# Altium PCB E-21 Neopixel Blaster.PcbDoc
Units mil, origin at the board's own origin, x right, y up, seen from the top; angles counter-clockwise.
Board outline 1178 x 1493 mil, 2 copper layers (Top Layer, Bottom Layer); 17 components, 15 nets, 67 pads, 15 vias.
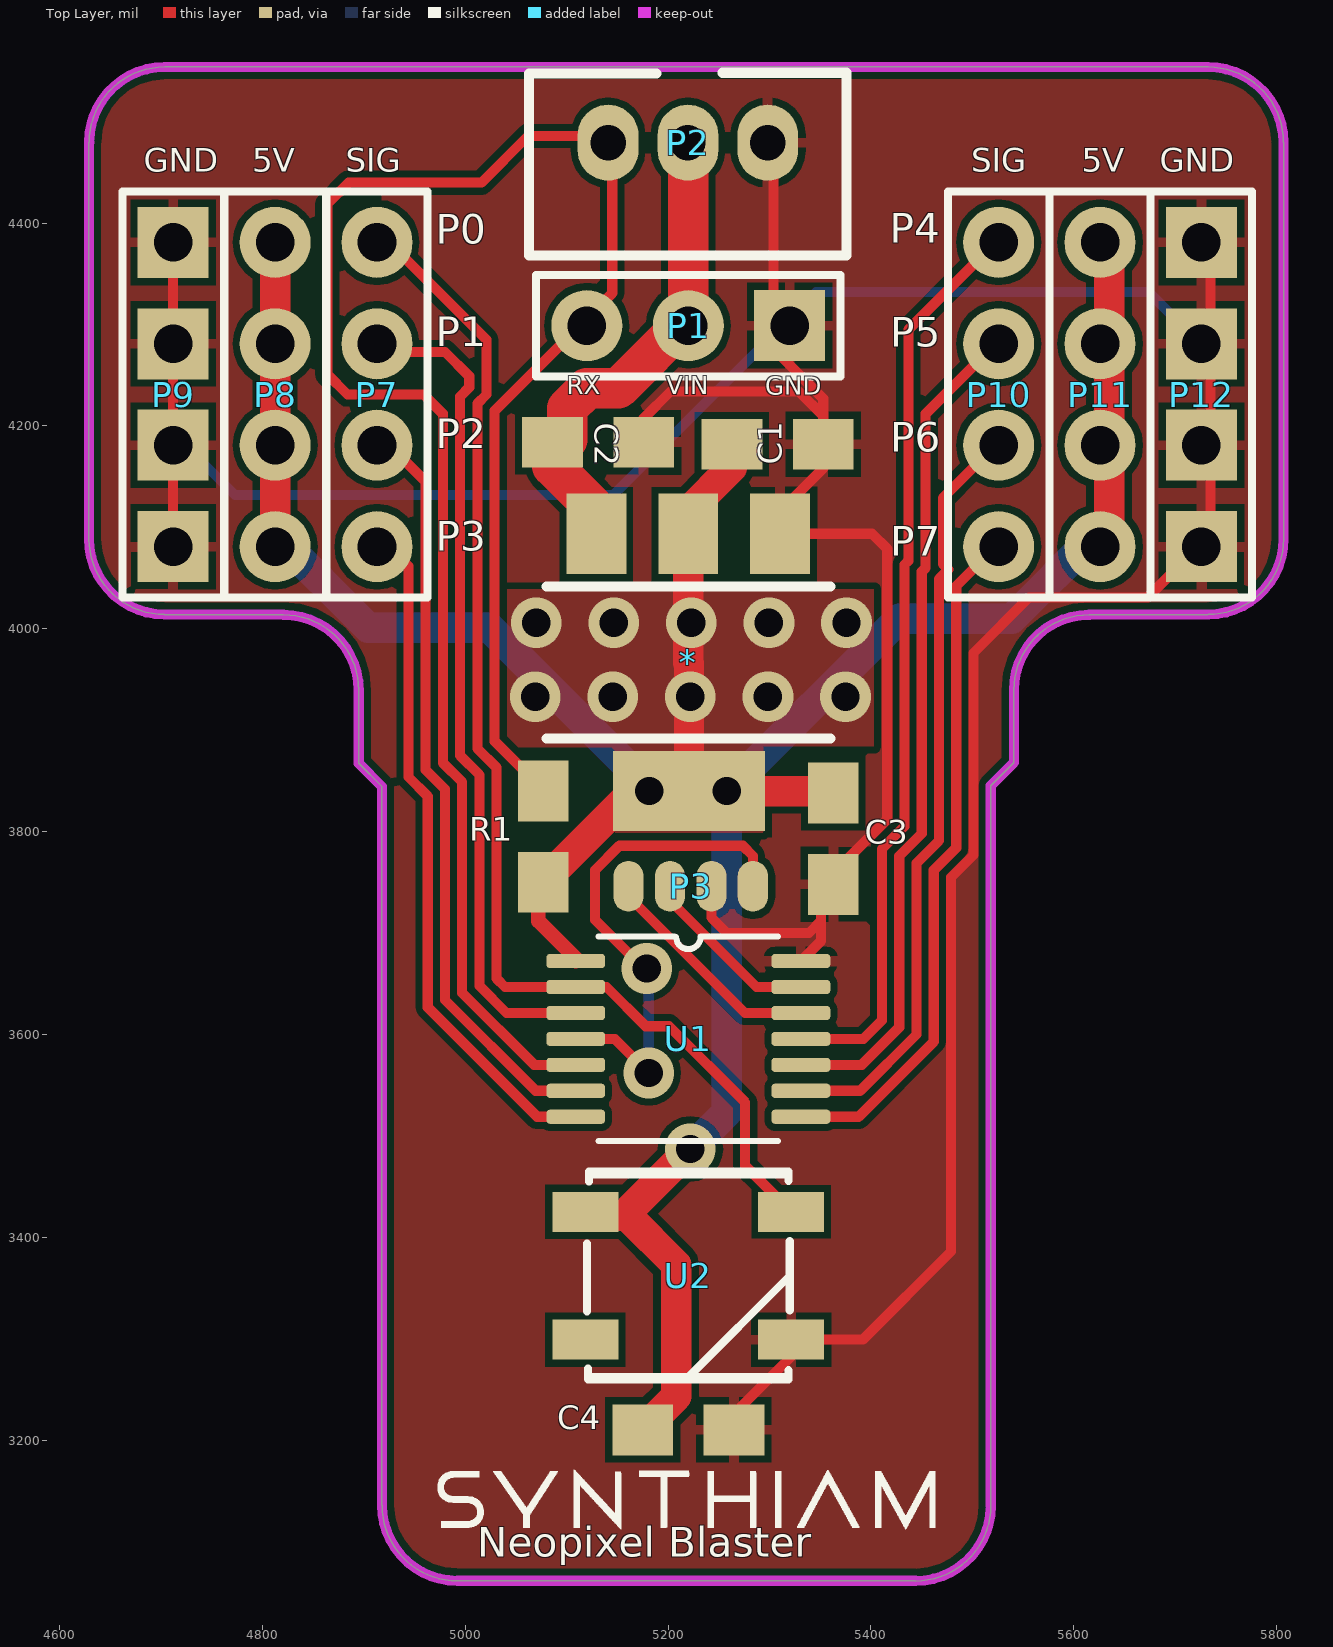
[diagram p0: Top Layer view]
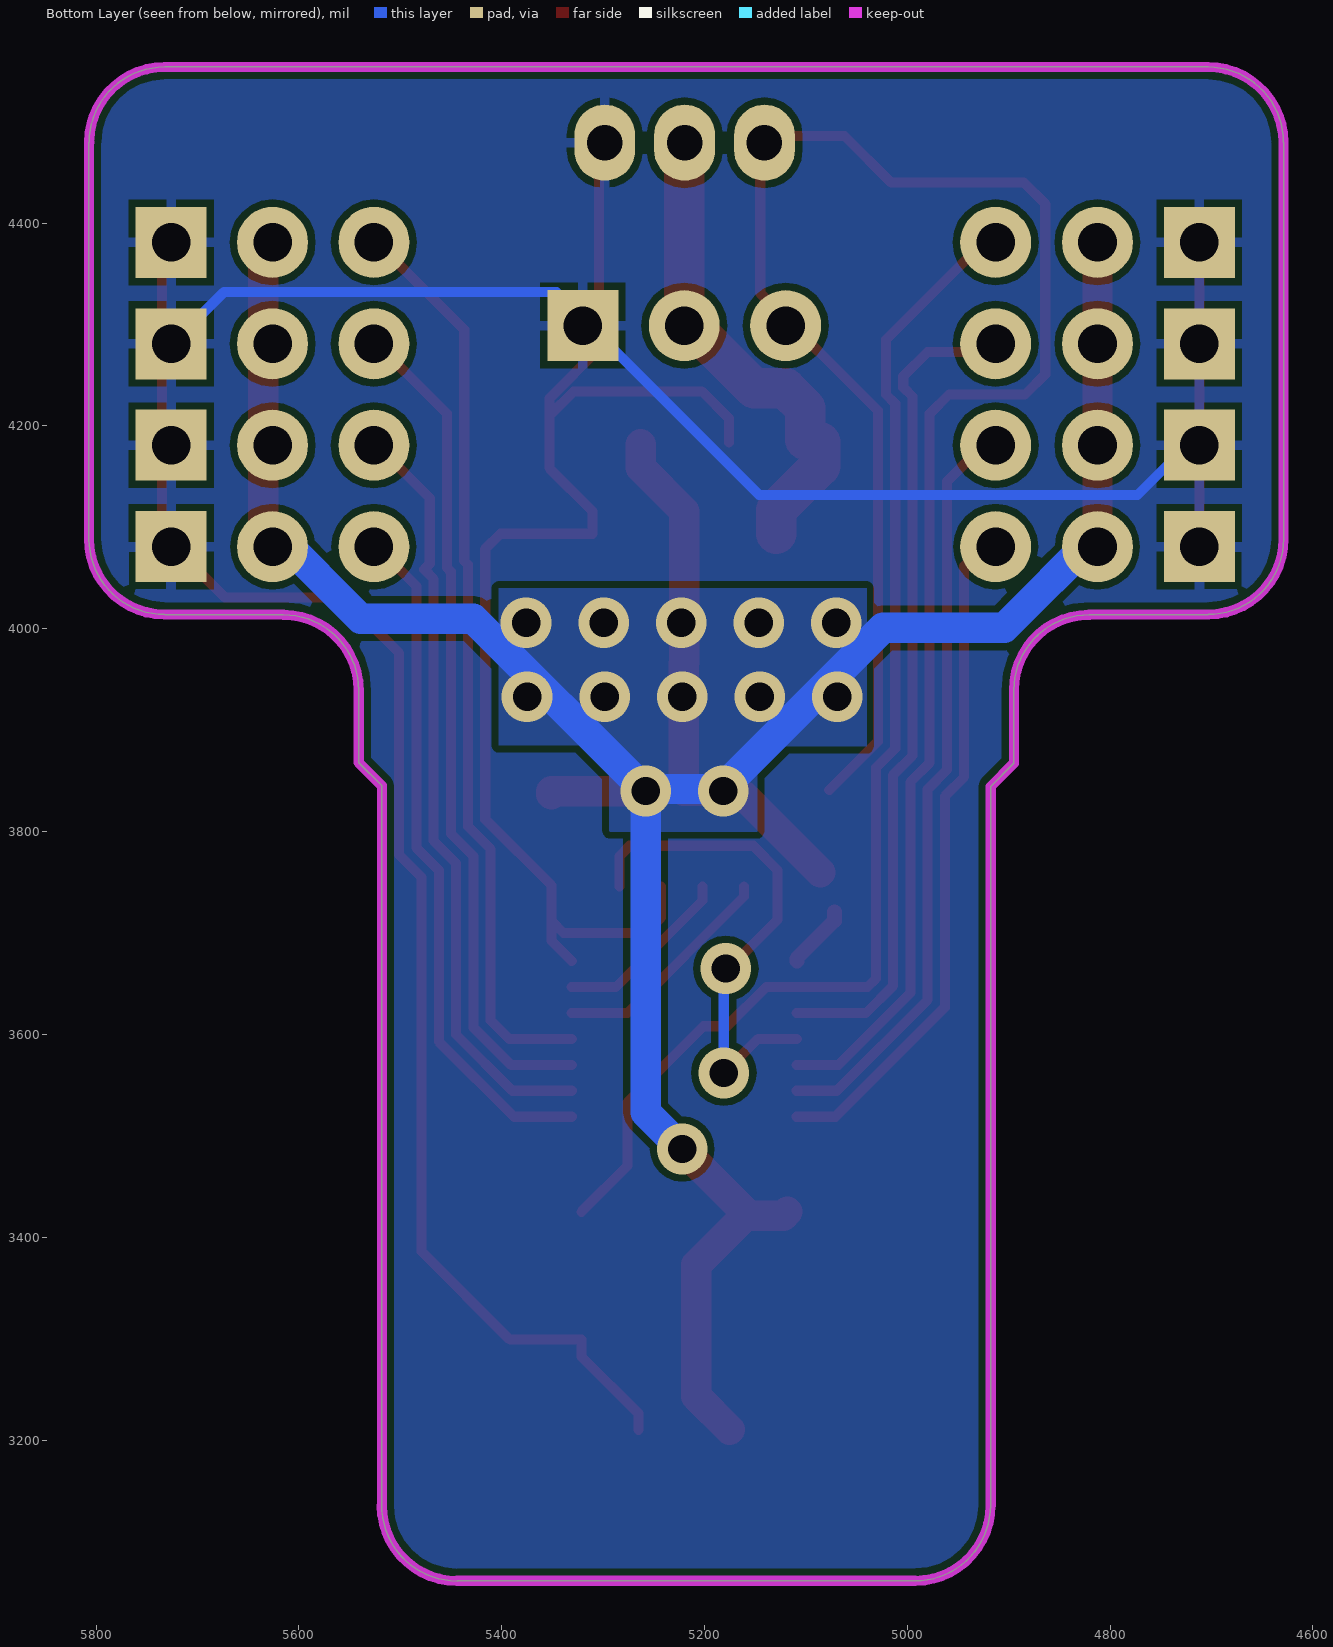
[diagram p1: Bottom Layer view, seen from below]

## Layer stack, top to bottom
Top Layer: signal copper 1.4
Dielectric: dielectric 12.6, FR-4, Dk 4.8
Bottom Layer: signal copper 1.4

## Board outline
4895,3867.31 4895,3939.5 ccw(c4820.69,3939.5) 4820.69,4013.81 4820.69,4014 4703.31,4014 4703.31,4014.19 cw(c4703.31,4088.5) 4629,4088.5 4629,4479.69 4629.19,4479.69 cw(c4703.5,4479.69) 4703.5,4554 5732.5,4554 cw(c5732.5,4479.69) 5806.81,4479.69 5807,4479.69 5807,4088.5 cw(c5732.69,4088.5) 5732.69,4014.19 5732,4014 5615.31,4014 5615.31,4013.81 ccw(c5615.31,3939.5) 5541,3939.5 5541,3868 5518.19,3845.19 5518.19,3135.31 5518.31,3135.31 cw(c5444,3135.31) 5444,3061 5444,3061.19 4992.31,3061.19 cw(c4992.31,3135.5) 4918,3135.5 4917.81,3135.5 4917.81,3844.5

## Design rules (kind name [scope] priority, off if disabled: settings)
Clearance [All] p1: gap=7
PolygonConnect PolygonConnect_7 [All vs IsNamedPolygon('Top Layer-VCC')] p1: connectstyle=Relief reliefconductorwidth=10 reliefentries=4 polygonreliefangle="90 Angle"
PolygonConnect PolygonConnect_6 [All vs IsNamedPolygon('Btm Layer1-VCC')] p2: connectstyle=Direct reliefconductorwidth=10 reliefentries=4 polygonreliefangle="90 Angle"
PolygonConnect PolygonConnect_5 [All vs IsNamedPolygon('Top Layer 1-VCC')] p3: connectstyle=Direct reliefconductorwidth=10 reliefentries=4 polygonreliefangle="90 Angle"
PolygonConnect PolygonConnect_4 [All vs IsNamedPolygon('btmLayer-VCC')] p4: connectstyle=Relief reliefconductorwidth=10 reliefentries=4 polygonreliefangle="90 Angle"
PolygonConnect PolygonConnect_3 [All vs IsNamedPolygon('Top Layer-VCC')] p5: connectstyle=Relief reliefconductorwidth=10 reliefentries=4 polygonreliefangle="90 Angle"
PolygonConnect PolygonConnect_2 [All vs IsNamedPolygon('Btm Layer-VCC')] p6: connectstyle=Direct reliefconductorwidth=10 reliefentries=4 polygonreliefangle="90 Angle"
PolygonConnect PolygonConnect_1 [All vs IsNamedPolygon('Top Layer-VCC')] p7: connectstyle=Direct reliefconductorwidth=10 reliefentries=4 polygonreliefangle="90 Angle"
PolygonConnect [All] p8: connectstyle=Relief reliefconductorwidth=10 reliefentries=4 polygonreliefangle="90 Angle"
RoutingVias [All] p1: holewidth=28 width=50 viastyle="Through Hole" minholewidth=28 minwidth=50 maxholewidth=28 maxwidth=50
SMDNeckDown [All] p1: percent=105.000
SilkscreenOverComponentPads [All] p1: minsilkscreentomaskgap=10
SolderMaskExpansion [All] p1: expansion=4
Width Width_2 [InNet('VCC')] p1: maxlimit=40 minlimit=10 preferedwidth=30 minimp=50.000000 maximp=50.000000 favimp=50.000000
Width Width_1 [InNet('VIN')] p2: maxlimit=50 minlimit=10 preferedwidth=40 minimp=50.000000 maximp=50.000000 favimp=50.000000
Width [All] p3: maxlimit=10 minlimit=7 preferedwidth=10 minimp=50.000000 maximp=50.000000 favimp=50.000000
27 further rules are at their usual default settings.

## Components (designator, comment, footprint, x,y, rotation, side; value= is the part's Value field where it differs from the comment)
* "VREG1117" VREG1117 5220,3967 r180 top
C1 "Cap" "0805 Tight" 5131,4184 r0 top
C2 "Cap" "0805 Tight" 5308,4182 r0 top
C3 "18pF" "0805 TIGHT" 5363,3793 r90 top
C4 "18pF" "0805 TIGHT" 5220,3210 r180 top
P1 "Header 3" HDR1X3 5120,4299 r0 top
P2 "Header 3" "JST-PH 3-PIN" 5357,4537 r0 top
P3 "Header 4" "MINI PROG4" 5222,3746 r180 top
P7 "Header 4" HDR1X4#1 4913,4381 r270 top
P8 "Header 4" HDR1X4#1 4812.5,4381 r270 top
P9 "Header 4" HDR1X4#2 4712,4381 r270 top
P10 "Header 4" HDR1X4#1 5526,4381 r270 top
P11 "Header 4" HDR1X4#1 5626,4081 r90 top
P12 "Header 4" HDR1X4#2 5726,4081 r90 top
R1 "Res1" "0805 TIGHT" 5077,3795 r270 top
U1 "PIC16F1704-I/ST" TSSOP14 5220.87,3594 r0 top
U2 "WS2812B" ws2812b 5220,3362 r0 top

## Footprints (in the part's own frame and the unit in brackets; to place one, negate y for a bottom-side part, rotate by r counter-clockwise, add the part's x,y. Pads: shape width x height; smd on the part's side, far side on the other; paste and mask are expansions set on the pad)
"0805 Tight" [mil]
  rect 60x50 smd: 1(-45,0) 2(45,0)
"0805 TIGHT" [mil]
  rect 60x50 smd: 1(-45,0) 2(45,0)
HDR1X3 [mil] "Connector; Header; 3 Position"
  round 70 hole 38: 1(0,0) 2(100,0)
  rect 70x70 hole 38: 3(200,0)
  silkscreen extent -50,-50 250,50
HDR1X4#1 [mil] "Connector; Header; 4 Position"
  round 70 hole 38: 1(0,0) 2(100,0) 3(200,0) 4(300,0)
  silkscreen extent -50,-50 350,50
HDR1X4#2 [mil] "Connector; Header; 4 Position"
  rect 70x70 hole 38: 1(0,0) 2(100,0) 3(200,0) 4(300,0)
  silkscreen extent -50,-50 350,50
"JST-PH 3-PIN" [mil]
  oval 60x75 hole 35: 1(-216.11,-57.64) 2(-137.37,-57.64) 3(-58.63,-57.64)
  silkscreen extent -294,-169 19,11
"MINI PROG4" [mil]
  oval 30x50 smd: 1(-61.74,0) 2(-20.84,0) 3(20.05,0) 4(60.95,0)
TSSOP14 [mil] "PIC16F1503"
  rrect50% 58x14 smd mask+4: 1(-111.87,78.35) 2(-111.87,52.76) 3(-111.87,27.17) 4(-111.87,1.57) 5(-111.87,-24.02) 6(-111.87,-49.61) 7(-111.87,-75.2) 8(110.13,-75.2) 9(110.13,-49.61) 10(110.13,-24.02) 11(110.13,1.57) 12(110.13,27.17) 13(110.13,52.76) 14(110.13,78.35)
  silkscreen extent -89,-99 88,102
VREG1117 [mil]
  rect 59x79 smd: 1(-90.55,-126.77) 2(0,-126.77) 3(90.55,-126.77)
  rect 150x79 smd: 2(-0.67,126.77)
  silkscreen extent -140,-75 140,75
ws2812b [mm]
  rect 1.651x1 smd: 1(-2.577,1.6) 2(-2.577,-1.6) 3(2.577,-1.6) 4(2.577,1.6)
  silkscreen extent -2.54,-2.59 2.54,2.62

## Part data
C1 C2: "Capacitor"
C3 C4: library part Cap, "Capacitor"
P1 P2: "Header, 3-Pin"
P3 P7 P8 P9 P10 P11 P12: "Header, 4-Pin"
R1: "Resistor"
U1: library part PIC16F1503

## Free pads (board coordinates)
  round 225 on Bottom Solder: 0(5220,3302)

## Via types
v1: diameter 50, hole 28, Top Layer to Bottom Layer, tented both sides, 9 vias
v2: diameter 50, hole 28, Top Layer to Bottom Layer, tented bottom, 6 vias

## Nets (pads, with @x,y where several pads share a name; then routed paths per layer and width w, separated by ;. In a path a pad name is that pad's centre, name@x,y a point inside that pad or via, vN(x,y) a via of type N, cw(c..) or ccw(c..) an arc to the next point about the centre after c; other vN are vias at no path point)
GND: *.1 C1.2 C2.2 C3.1 C4.1 P1.3 P2.3 P3.2 P9.1 P9.2 P9.3 P9.4 P12.1 P12.2 P12.3 P12.4 U1.14 U2.3 | length 4287.8
  Top Layer w10: P9.4@4712,4093 P9.1@4712,4393 ; C1.2 5176,4207.59 5202.41,4234 5329,4234 5353,4210 ; P3.2 5242.84,3715.2 5258.04,3700 5339,3700 5351,3712 ; C4.1 5265,3226 5321.46,3282.46 U2.3 5392.01,3299.01 5479,3386 5479,3754.79 5501.19,3776.98 5501.19,3976.19 5556,4031 5673,4031 5735,4093 P12.4@5735,4393 ; P2.3@5320,4477 5304,4461 5304,4276 5353,4227 5353,4210 ; U1.14 5351,3692.35 5351,3712 ; 5351,3712 5351,3747 5416.19,3812.19 5416.19,4078.81 5401.23,4093.77 *.1 5310.55,4116 5353,4158.45 C2.2 5353,4210
  Bottom Layer w10: P9.3@4712,4193 4773,4132 5146,4132 5346,4332 5674,4332 5713,4293 P12.3@5735,4293
MCLR: P3.1 U1.4 | length 493.7
  Top Layer w10: U1.4 5147.43,3595.57 v1(5181,3562) ; v1@5167,3674 5128,3713 5128,3762 5152,3786 5273.74,3786 5283.74,3776 P3.1
  Bottom Layer w10: v1(5179,3665) 5181,3663 v1(5181,3562)
PGC: P3.4 U1.12 | length 227.5
  Top Layer w10: P3.4 5161.05,3735.95 5275.83,3621.17 U1.12
PGD: P3.3 U1.13 | length 178.3
  Top Layer w10: P3.3 5201.95,3732.05 5287.24,3646.76 U1.13
RA2: P10.1 U1.11 | length 918
  Top Layer w10: U1.11 5392.57,3595.57 5411,3614 5411,3782.96 5433.19,3805.14 5433.19,4063.31 5437,4067.12 5437,4295 P10.1@5535,4393
RA4: P7.2 U1.3 | length 828
  Top Layer w10: P7.2@4913,4293 4933,4273 4980,4273 5004,4249 5004,4238.08 4995,4229.08 4995,3874.92 5014,3855.92 5014,3647.96 5040.79,3621.17 U1.3
RA5: P7.1 U1.2 U2.4 | length 1216.7
  Top Layer w10: P7.1@4913,4393 5021,4285 5021,4231.04 5012,4222.04 5012,3881.96 5031,3862.96 5031,3655 5039.24,3646.76 U1.2 5139.24,3646.76 5178,3608 5201,3608 5276,3533 5276,3470.45 U2.4
RC0: P10.2 U1.10 | length 842.7
  Top Layer w10: U1.10 5391.03,3569.98 5428,3606.96 5428,3775.92 5450.19,3798.1 5450.19,4056.27 5454,4060.08 5454,4212 P10.2@5535,4293
RC1: P10.3 U1.9 | length 772
  Top Layer w10: U1.9 5389.48,3544.39 5445,3599.92 5445,3768.88 5467.19,3791.06 5467.19,4049.23 5476.54,4058.58 5471,4064.12 5471,4129 P10.3@5535,4193
RC2: P10.4 U1.8 | length 692
  Top Layer w10: U1.8 5387.93,3518.8 5462,3592.88 5462,3761.83 5484.19,3784.02 5484.19,4042.19 P10.4@5535,4093
RC3: P7.4 U1.7 | length 677.6
  Top Layer w10: P7.4@4913,4093 4944,4062 4944,3853.79 4963,3834.79 4963,3626.83 5071.03,3518.8 U1.7
RC4: P7.3 U1.6 | length 752.9
  Top Layer w10: P7.3@4913,4193 4961,4145 4961,3860.83 4980,3841.83 4980,3633.88 5069.48,3544.39 U1.6
RX: P1.1 P2.1 R1.1 U1.5 | length 2040.2
  Top Layer w10: R1.1@5077,3841 5029,3889 5029,4215 5145,4331 5145,4486 5062,4486 5016,4440 4885,4440 4864,4419 4864,4251 4884,4231 4959,4231 4978,4212 4978,3867.88 4997,3848.88 4997,3640.92 5067.93,3569.98 U1.5
VCC: *.2 C2.1 C3.2 C4.2 P8.1 P8.2 P8.3 P8.4 P11.1 P11.2 P11.3 P11.4 R1.2 U1.1 U2.1 | length 3081
  Top Layer w14.7: R1.2@5072,3721 5072,3712 5109,3675 U1.1
  Top Layer w30: P8.4@4812.5,4093 P8.1@4812.5,4393 ; R1.2@5086,3760 *.2@5161,3835 ; U2.1 U2.1@5122.54,3421 ; C4.2 5208,3243 5208,3373 5160,3421 U2.1@5122.54,3421 ; *.2@5183,3842 5183,3840.23 5220.67,3840.23 5220.67,3966 5220,3966.67 5220,4093.77 5220,4116 5263,4159 C2.1 ; v1(5222,3487) 5156,3421 U2.1@5122.54,3421 ; v2(5258,3840) 5351,3840 C3.2@5351,3837 ; P11.1@5635,4093 P11.4@5635,4393
  Bottom Layer w30: P8.4@4812.5,4093 4904.5,4001 5024,4001 5183,3842 5258,3842 v2(5258,3840) ; v1(5222,3487) 5258,3523 v2(5258,3840) ; P11.1@5635,4093 5622,4093 5539,4010 5428,4010 v2(5258,3840)
  other v1: 5145.5,3933 5222,3933 5298.5,3933 5146.5,4006 5223,4006 5299.5,4006
  other v2: 5181.5,3840 5069,3933 5375,3933 5070,4006 5376,4006
VIN: *.3 C1.1 P1.2 P2.2 | length 459.4
  Top Layer w40: C1.1 5086,4160.45 5129.45,4117 *.3 ; C1.1@5100.5,4186.5 5100.5,4217.5 5120,4237 5151,4237 5220,4306 P2.2@5220,4470
pads on no net: U2.2

## Polygon pours and split planes (outlines as drawn)
VCC on Bottom Layer "Btm Layer1-VCC" (solid, pour order 4): 5040,4040 5040,3884 5144,3884 5148,3880 5148,3800 5295,3800 5294,3801 5294,3885 5403,3885 5403,4040 5040,4040
GND on Bottom Layer "btmLayer-VCC" (solid, pour order 9): 4895,3867.31 4895,3939.5 ccw(c4820.69,3939.5) 4820.69,4013.81 4820.69,4014 4703.31,4014 4703.31,4014.19 cw(c4703.31,4088.5) 4629,4088.5 4629,4397.69 4634.23,4474.45 cw(c4708.55,4474.45) 4708.55,4548.77 5219,4551 5730.45,4550.77 cw(c5730.45,4476.45) 5804.77,4476.45 5807,4397.69 5807,4088.5 cw(c5732.69,4088.5) 5732.69,4014.19 5732,4014 5615.31,4014 5615.31,4013.81 ccw(c5615.31,3939.5) 5541,3939.5 5541,3868 5518.19,3845.19 5518.19,3135.31 5518.31,3135.31 cw(c5444,3135.31) 5444,3061 5444,3061.19 4992.31,3061.19 cw(c4992.31,3135.5) 4918,3135.5 4917.81,3135.5 4917.81,3844.5
VCC on Top Layer "Top Layer 1-VCC" (solid, pour order 2): 5040,4039 5040,3883 5144,3883 5148,3879 5148,3799 5295,3799 5294,3800 5294,3884 5403,3884 5403,4039 5040,4039
GND on Top Layer "Top Layer-VCC" (solid, pour order 8): 4895,3867.31 4895,3939.5 ccw(c4820.69,3939.5) 4820.69,4013.81 4820.69,4014 4703.31,4014 4703.31,4014.19 cw(c4703.31,4088.5) 4629,4088.5 4629,4397.69 4629.23,4479.45 cw(c4703.55,4479.45) 4703.55,4553.77 5219,4559 5733.45,4553.77 cw(c5733.45,4479.45) 5807.77,4479.45 5807,4397.69 5807,4088.5 cw(c5732.69,4088.5) 5732.69,4014.19 5732,4014 5615.31,4014 5615.31,4013.81 ccw(c5615.31,3939.5) 5541,3939.5 5541,3868 5518.19,3845.19 5518.19,3135.31 5518.31,3135.31 cw(c5444,3135.31) 5444,3061 5444,3061.19 4992.31,3061.19 cw(c4992.31,3135.5) 4918,3135.5 4917.81,3135.5 4917.81,3844.5

## Keep-outs
Keep-Out Layer:
  lines w10: 4629,4479.69 4629,4088.5 ccw(c4703.31,4088.5) 4703.31,4014.19 ; 4629.19,4479.69 cw(c4703.5,4479.69) 4703.5,4554 5732.5,4554 cw(c5732.5,4479.69) 5806.81,4479.69 ; 4703.31,4014 4820.69,4014 ; 4820.69,4013.81 cw(c4820.69,3939.5) 4895,3939.5 4895,3867.31 4917.81,3844.5 4917.81,3135.5 ; 4918,3135.5 ccw(c4992.31,3135.5) 4992.31,3061.19 5444,3061.19 ; 5444,3061 ccw(c5444,3135.31) 5518.31,3135.31 ; 5518.19,3135.31 5518.19,3845.19 5541,3868 5541,3939.5 cw(c5615.31,3939.5) 5615.31,4013.81 ; 5615.31,4014 5732,4014 ; 5732.69,4014.19 ccw(c5732.69,4088.5) 5807,4088.5 5807,4479.69

## Silkscreen, mask and mechanical layers (free items; w line width, h text height)
Top Overlay:
  drawing of 2260 lines, arcs and shapes, not listed
  text "GND" at 4683,4443 h40
  text "5V" at 4790,4443 h40
  text "SIG" at 4882,4443 h40
  text "SIG" at 5499,4443 h40
  text "5V" at 5608,4443 h40
  text "GND" at 5685,4443 h40
  text "P4" at 5418.45,4371 h50
  text "P0" at 4971,4370 h50
  text "P1" at 4971,4268.64 h50
  text "P5" at 5419,4268.03 h50
  text "RX" at 5100,4225.48 h30
  text "VIN" at 5198,4225.48 h30
  text "GND" at 5296,4225 h30
  text "P2" at 4971,4168 h50
  text "P6" at 5419.19,4164.67 h50
  text "P3" at 4971,4067 h50
  text "P7" at 5419.19,4062 h50
  text "Neopixel Blaster" at 5012,3075 h50